# EAGLE board clink (EAGLE 6.5.0)
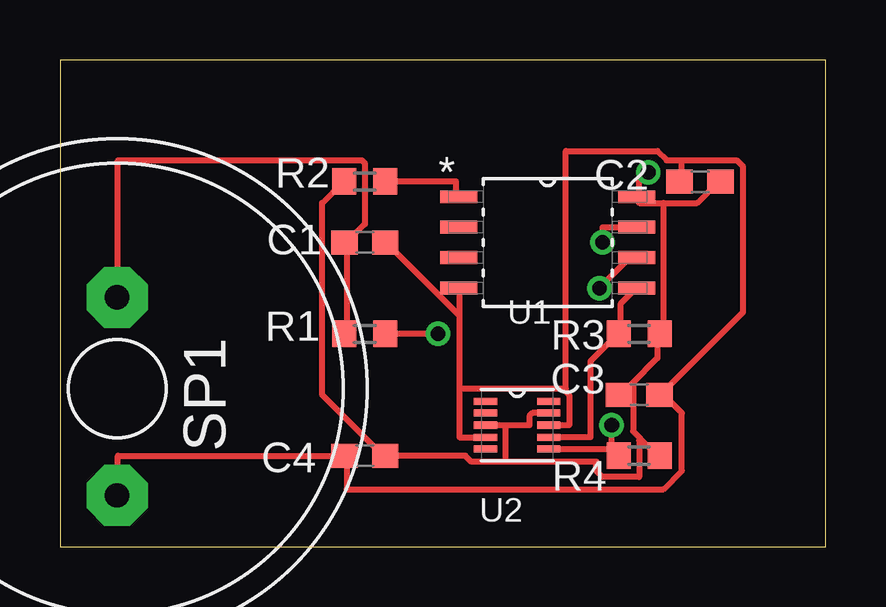
[diagram p0: board, top side]
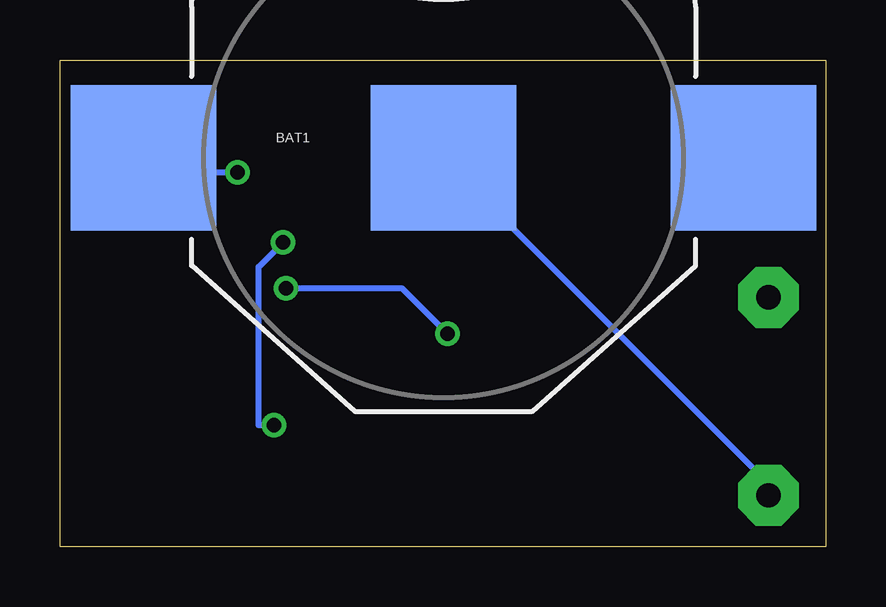
[diagram p1: board, bottom side, seen from below]

Size 31.9 x 20.31 mm. Coordinates in mm from the lower left corner, seen from the top.
Outline: 0,0 31.9,0 31.9,20.31 0,20.31 0,0
Copper layers (1*16): Top 0.035mm / dielectric 1.5mm / Bottom 0.035mm
Design rules "default": minimum track width 10mil, minimum drill 24mil, track to track 8mil, track to pad 8mil, pad to pad 8mil, via to via 8mil, smd to smd 8mil, copper to edge 40mil, drill to drill 8mil, minimum pad ring 10mil, minimum via ring 8mil, stop-mask expansion 4mil, vias tented up to drill 0mil, thermal gap 10mil

## Footprints (pad centres in the part's own frame; a part is rotated, then mirrored left to right if it is on the bottom)
BATTCON_20MM = smd 6.07 x 6.07: 1 -12.5,0; 2 0,0; 3 12.5,0
C0603 = smd 1.1 x 1: 1 -0.85,0; 2 0.85,0
R0603 = smd 1 x 1.1: 1 -0.85,0; 2 0.85,0
AL201P = drill 1.016 pad 2.54 octagon: 1 -3.81,0; 2 4.445,0
SOIC127P798X216-8N = smd 1.549 x 0.533: 1 -3.708,1.905; 2 -3.708,0.635; 3 -3.708,-0.635; 4 -3.708,-1.905; 5 3.708,-1.905; 6 3.708,-0.635; 7 3.708,0.635; 8 3.708,1.905
DFN300X300X100-10N = smd 0.965 x 0.305: 1 -1.321,0.991; 2 -1.321,0.508; 3 -1.321,0; 4 -1.321,-0.508; 5 -1.321,-0.991; 6 1.321,-0.991; 7 1.321,-0.508; 8 1.321,0; 9 1.321,0.508; 10 1.321,0.991

## Placement (x,y rotation side)
BAT1  3v  [BATTCON_20MM]  15.92,16.23 0 bottom
C1  .1u  [C0603]  12.7,12.7 0 top
C2  .1u  [C0603]  26.67,15.24 180 top
C3  .1u  [C0603]  24.13,6.35 0 top
C4  100p  [C0603]  12.7,3.81 180 top
R1  130  [R0603]  12.7,8.89 180 top
R2  10k  [R0603]  12.7,15.24 0 top
R3  4.7k  [R0603]  24.13,8.89 0 top
R4  4.7k  [R0603]  24.13,3.81 0 top
SP1  Piezo  [AL201P]  2.38,6.6 270 top
U1  ATTINY85-20SU  [SOIC127P798X216-8N]  20.32,12.7 0 top
U2  MMA7660FCT  [DFN300X300X100-10N]  19.05,5.08 0 top

## Library data of the parts
BAT1 = SparkFun-Electromechanical
C1-C4 R1-R4 = rcl
SP1 = buzzer; OC_FARNELL: unknown; OC_NEWARK: unknown
U1 = Atmel_By_element14_Batch_1-00; MPN: ATTINY85-20SU; OC_FARNELL: 1455164; OC_NEWARK: 58M3797; PACKAGE: SOIC-8; SUPPLIER: Atmel
U2 = Freescale_By_element14_Batch_1; MPN: MMA7660FCT; OC_FARNELL: -; OC_NEWARK: 74P0443; PACKAGE: DFN-10; SUPPLIER: FREESCALE SEMICONDUCTOR

## Nets
3.3V: BAT1.1 C2.1 C3.1 C4.1 R2.1 R3.2 R4.2 U1.8 U2.3 U2.9
GND: BAT1.2 C1.2 C2.2 C3.2 C4.2 SP1.2 U1.4 U2.4 U2.8
N$1: C1.1 R1.2 SP1.1
N$3: R1.1 U1.6
N$9: R2.2 U1.1
SCL: R4.1 U1.7 U2.6
SDA: R3.1 U1.5 U2.7

## Tracks (layer width: path | path; a pad name or v marks a point on that pad's centre or on a via)
3.3V  (via drill 0.61)
  Top 0.254: 18.54,5.08 19.56,5.08 19.56,5.46 19.68,5.59 U2.9 | 18.54,5.08 U2.3 | 18.54,3.56 17.14,3.56 16.89,3.81 C4.1 13.46,3.81 10.92,6.35 10.92,14.35 11.81,15.24 R2.1 | 18.54,5.08 18.54,3.56 | 25.15,14.35 24.13,14.35 24.13,14.61 | 25.15,14.35 26.54,14.35 27.43,15.24 C2.1 | 23.81,6.79 24.89,7.87 24.89,8.89 R3.2 25.02,8.89 25.15,9.02 25.15,14.35 | 23.81,6.79 23.37,6.35 C3.1 | 24.19,4.51 23.88,4.83 23.88,6.73 23.81,6.79 | 24.19,4.51 24.89,3.81 R4.2 | v24.51,15.62 24.13,15.24 24.13,14.61 | 24.13,14.61 U1.8 | 18.54,3.56 22.35,3.56 22.35,3.17 22.61,2.92 24.13,2.92 24.13,4.45 24.19,4.51
  Bottom 0.254: v24.51,15.62 27.81,15.62 28.32,16.13 BAT1.1
GND
  Top 0.254: 25.91,16.13 28.19,16.13 28.45,15.88 28.45,9.78 25.02,6.35 C3.2 25.15,6.35 25.91,5.59 25.91,3.17 25.15,2.41 11.94,2.41 11.94,3.81 C4.2 2.41,3.81 2.41,2.16 SP1.2 | 25.91,16.13 25.91,15.24 C2.2 | U2.4 16.64,4.57 16.64,6.6 | 16.64,9.65 16.64,10.79 U1.4 | 16.64,9.65 16.64,6.6 | U2.8 21.21,5.08 21.21,6.35 21.02,6.54 | 21.02,6.54 20.95,6.6 16.64,6.6 | 16.64,9.65 13.59,12.7 C1.2 | 25.91,16.13 25.27,16.13 24.89,16.51 21.08,16.51 21.08,6.6 21.02,6.54
  Bottom 0.254: BAT1.2 15.88,16.13 2.41,2.67 2.41,2.16 SP1.2
N$1
  Top 0.254: 11.94,12.7 11.94,8.89 R1.2 | 11.94,12.7 12.7,13.46 12.7,16 12.57,16.13 2.41,16.13 2.41,10.41 SP1.1 | 11.94,12.7 C1.1
N$3  (via drill 0.61)
  Top 0.254: v15.75,8.89 R1.1 | v22.48,10.79 23.75,12.06 U1.6
  Bottom 0.254: v15.75,8.89 17.65,10.79 v22.48,10.79
N$9
  Top 0.254: R2.2 16.51,15.24 16.51,14.61 U1.1
SCL  (via drill 0.61)
  Top 0.254: 22.99,4.06 23.24,4.06 23.24,3.81 R4.1 22.99,4.06 | 22.99,4.06 20.45,4.06 U2.6 | U1.7 22.61,13.34 v22.61,12.7 | 22.99,4.06 v22.99,5.08
  Bottom 0.254: v22.61,12.7 23.62,11.68 23.62,5.08 v22.99,5.08
SDA
  Top 0.254: U2.7 22.1,4.57 22.1,7.75 23.24,8.89 R3.1 23.37,8.89 23.37,10.16 24,10.79 U1.5